# Altium PCB M3 M4 LQFP144_1.PcbDoc
Units mil, origin at the board's own origin, x right, y up, seen from the top; angles counter-clockwise.
Board outline 2214.4 x 3310.03 mil, 2 copper layers (Top Layer, Bottom Layer); 5 components, 0 nets, 132 pads, 0 vias.
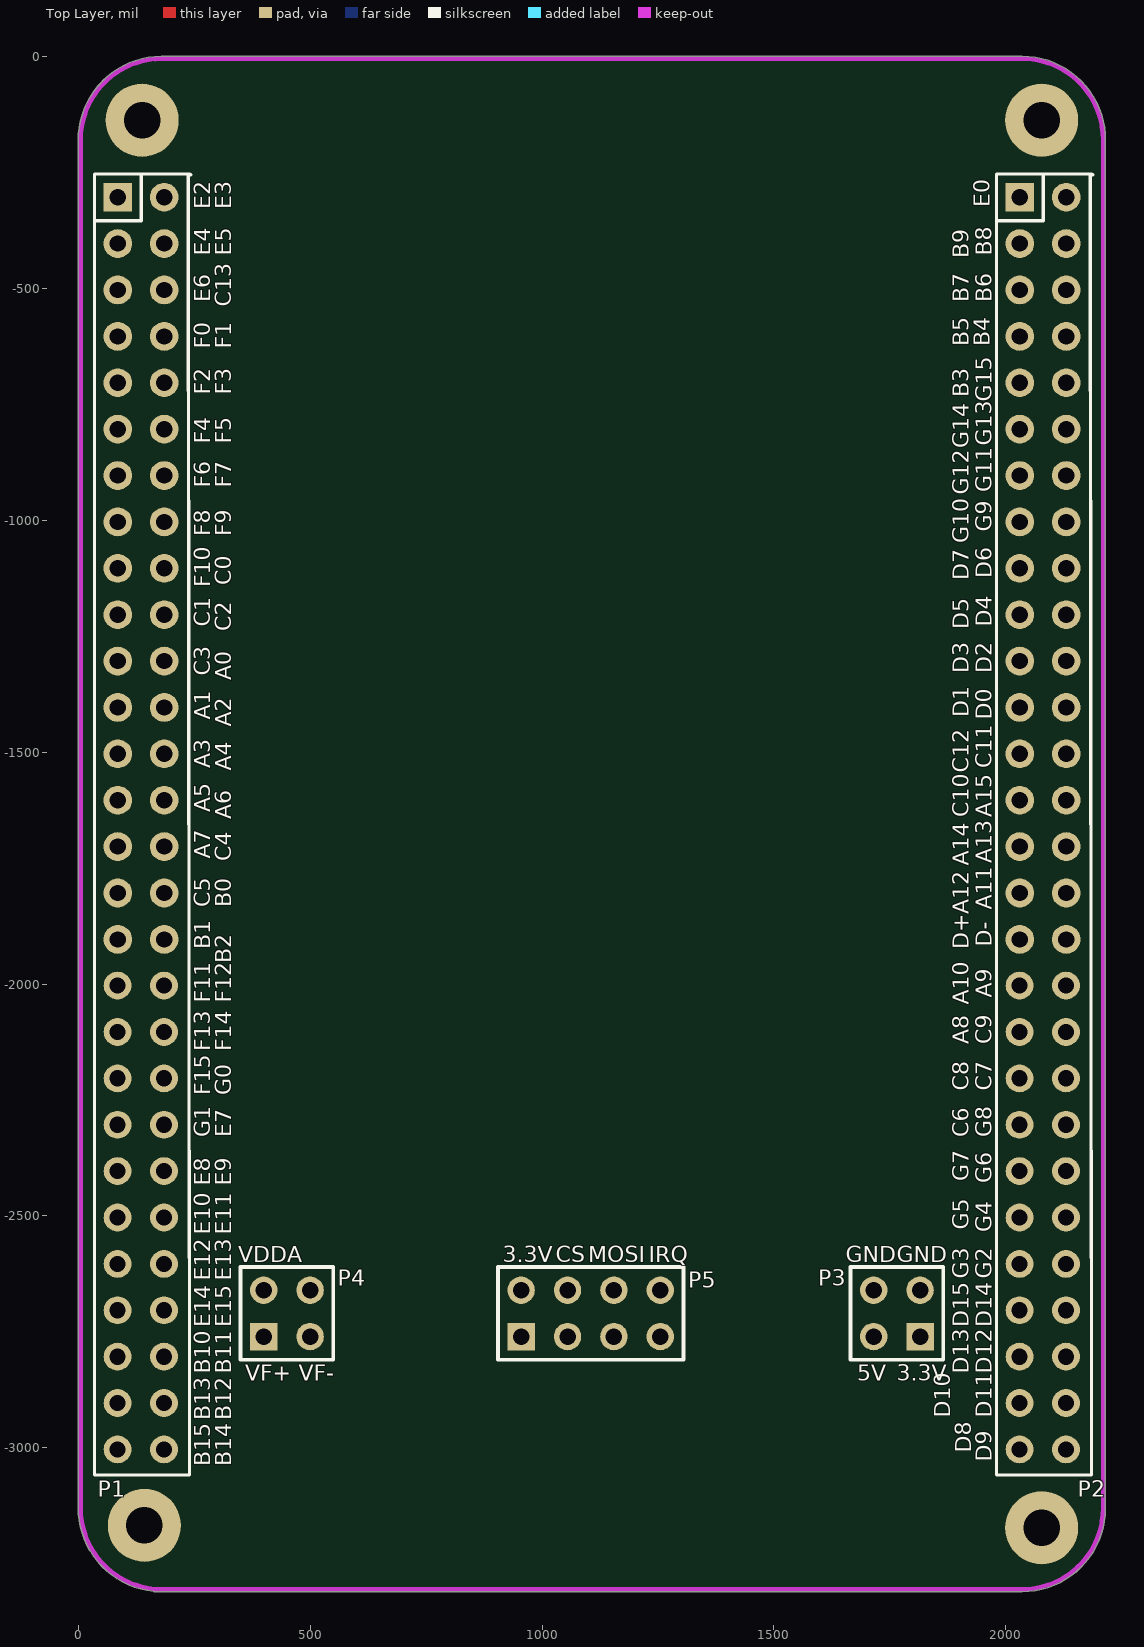
[diagram p0: Top Layer view]
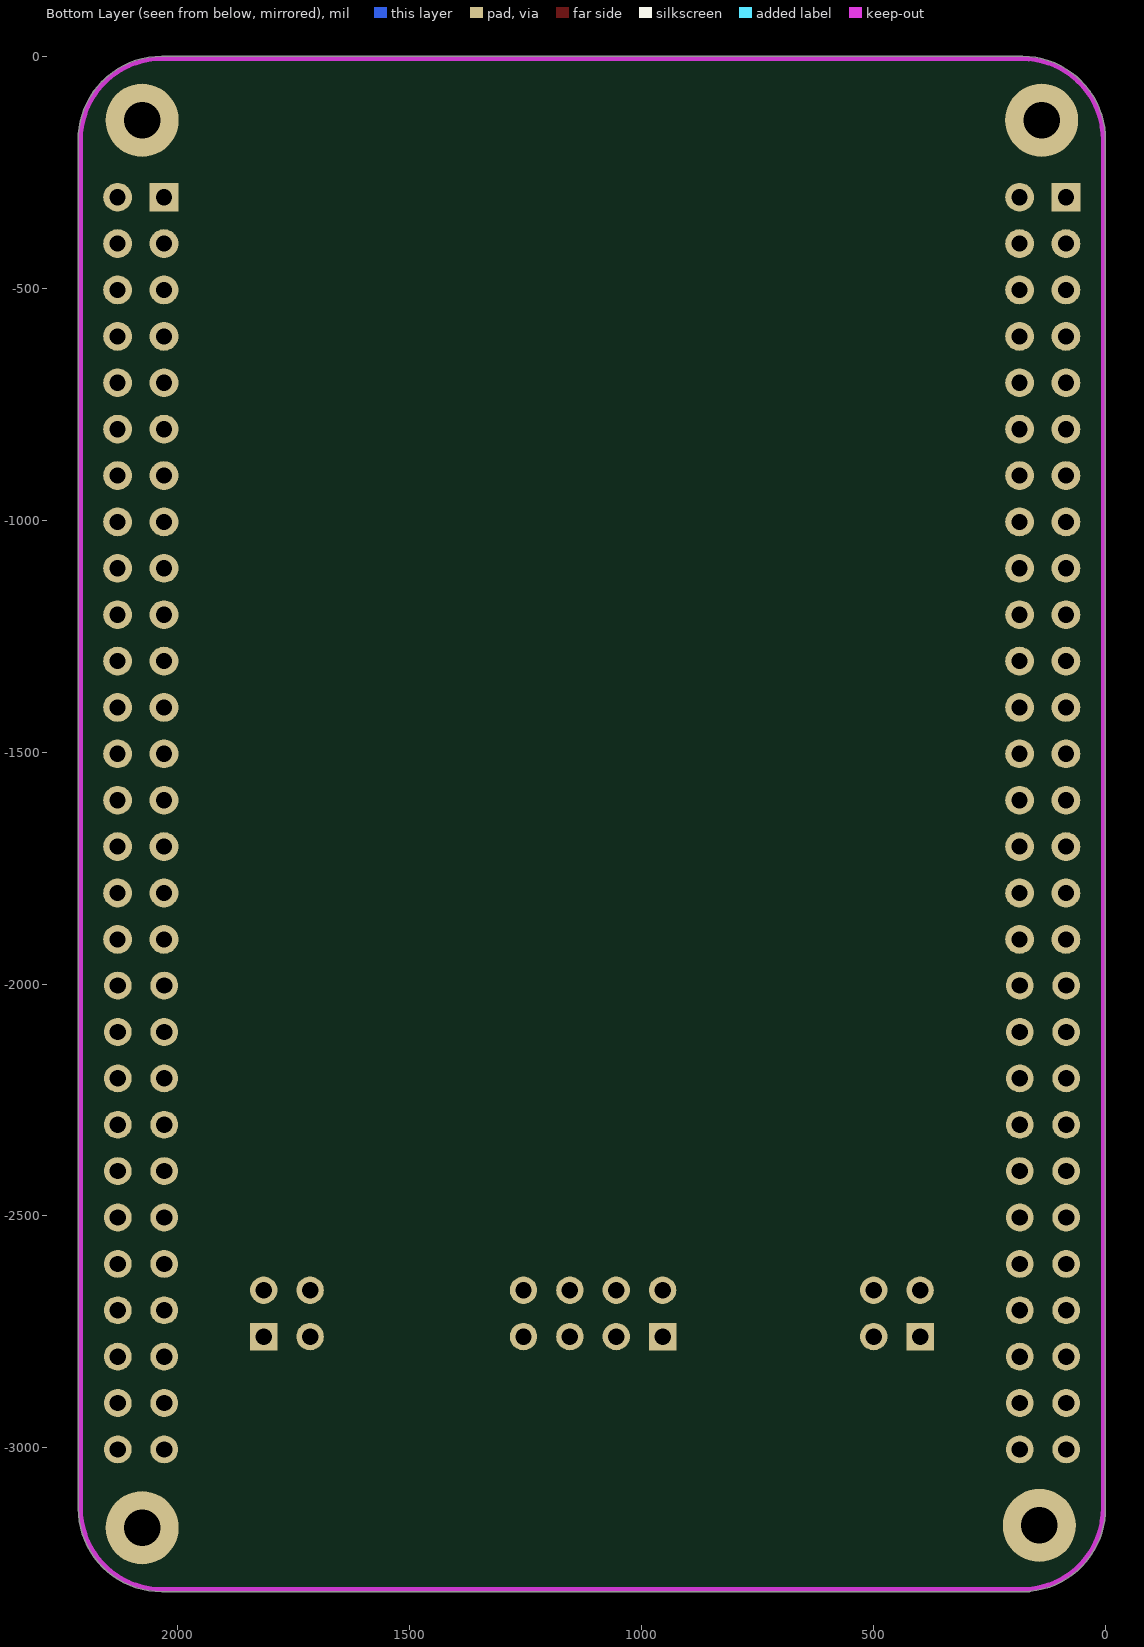
[diagram p1: Bottom Layer view, seen from below]

## Layer stack, top to bottom
Top Layer: signal copper 1.4
Dielectric: dielectric 12.6, FR-4, Dk 4.8
Bottom Layer: signal copper 1.4

## Board outline
0.69,-3141.94 ccw(c180.24,-3130.07) 162.11,-3309.1 ccw(c165,-3305) 165,-3310.02 2034.68,-3310.02 ccw(c2034.68,-3305) 2034.7,-3310.02 ccw(c2034.76,-3130.07) 2214.7,-3130.07 2214.7,-170 ccw(c2209.68,-170) 2214.31,-168.06 ccw(c2034.76,-179.93) 2034.76,0.01 180,0.01 ccw(c180,-5) 179.14,-0.06 ccw(c180.24,-180) 0.7,-168.04 ccw(c5.32,-170) 0.3,-170 0.3,-3140 ccw(c5.32,-3140)

## Design rules (kind name [scope] priority, off if disabled: settings)
Clearance [All] p1: gap=8
PolygonConnect [All] p1: connectstyle=Direct reliefconductorwidth=10 reliefentries=4 polygonreliefangle="90 Angle"
RoutingVias [All] p1: holewidth=28 width=50 viastyle="Through Hole" minholewidth=15 minwidth=15 maxholewidth=28 maxwidth=50
SolderMaskExpansion [All] p1: expansion=4
TestPointUsage [All] p1: valid=0 allowmultiple=FALSE
Testpoint [All] p1: side=15 testpointundercomponent=TRUE minsize=40 maxsize=100 preferedsize=60 minholesize=0 maxholesize=40 preferedholesize=32 testpointgrid=1 style=1023 order=0-112345678
Width [All] p1: maxlimit=70 minlimit=8 preferedwidth=10
19 further rules are at their usual default settings.

## Components (designator, comment, footprint, x,y, rotation, side; value= is the part's Value field where it differs from the comment)
P1 "HEAD2*27" HEAD2*27 135.24,-1653.54 r270 top
P2 "HEAD2*27" HEAD2*27 2079.76,-1653.54 r270 top
P3 "VREF" HDR2X2 1815,-2760 r90 top
P4 "VREF" HDR2X2 400,-2760 r0 top
P5 "NRF2401" HDR2X4 955,-2760 r0 top

## Footprints (in the part's own frame and the unit in brackets; to place one, negate y for a bottom-side part, rotate by r counter-clockwise, add the part's x,y. Pads: shape width x height; smd on the part's side, far side on the other; paste and mask are expansions set on the pad)
HDR2X2 [mm]
  rect 1.5x1.5 hole 0.9: 1(0,0)
  round 1.5 hole 0.9: 2(0,2.54) 3(2.54,0) 4(2.54,2.54)
  silkscreen extent -1.27,-1.27 3.81,3.81
HDR2X4 [mm] "Connector; Header; 4x2 Position"
  rect 1.5x1.5 hole 0.9: 1(0,0)
  round 1.5 hole 0.9: 2(0,2.54) 3(2.54,0) 4(2.54,2.54) 5(5.08,0) 6(5.08,2.54) 7(7.62,0) 8(7.62,2.54)
  silkscreen extent -1.27,-1.27 8.89,3.81
HEAD2*27 [mil]
  rect 62x62 hole 35: 1(-1349.79,-49.79)
  round 62 hole 35: 2(-1349.79,50.21) 3(-1249.79,-49.79) 4(-1249.79,50.21) 5(-1149.79,-49.79) 6(-1149.79,50.21) 7(-1049.79,-49.79) 8(-1049.79,50.21) 9(-949.79,-49.79) 10(-949.79,50.21) 11(-849.79,-49.79) 12(-849.79,50.21) 13(-749.79,-49.79) 14(-749.79,50.21) 15(-649.79,-49.79) 16(-649.79,50.21) 17(-549.79,-49.79) 18(-549.79,50.21) 19(-449.79,-49.79) 20(-449.79,50.21) 21(-349.79,-49.79) 22(-349.79,50.21) 23(-249.79,-49.79) 24(-249.79,50.21) 25(-149.79,-49.79) 26(-149.79,50.21) 27(-49.79,-49.79) 28(-49.79,50.21) 29(50.21,-49.79) 30(50.21,50.21) 31(150.21,-49.79) 32(150.21,50.21) 33(250.21,-49.79) 34(250.21,50.21)
  round 60 hole 35: 35(349.79,-50.21) 36(349.79,49.79) 37(449.79,-50.21) 38(449.79,49.79) 39(549.79,-50.21) 40(549.79,49.79) 41(649.79,-50.21) 42(649.79,49.79) 43(749.79,-50.21) 44(749.79,49.79) 45(849.79,-50.21) 46(849.79,49.79) 47(949.79,-50.21) 48(949.79,49.79) 49(1049.79,-50.21) 50(1049.79,49.79) 51(1149.79,-50.21) 52(1149.79,49.79) 53(1249.79,-50.21) 54(1249.79,49.79) 55(1349.79,-50.21) 56(1349.79,49.79)
  silkscreen extent -1400,-100 1405,107

## Part data
P3 P4: library part "Header 2X2", "Header, 2-Pin, Dual row"
P5: library part "Header 4X2", "Header, 4-Pin, Dual row"

## Free pads (board coordinates)
  round 157.48 hole 78.74: 0(137.8,-137.8) 0(142.8,-3167.2) 0(2077.2,-3172.2) 0(2077.2,-137.8)

## Nets (pads, with @x,y where several pads share a name; then routed paths per layer and width w, separated by ;. In a path a pad name is that pad's centre, name@x,y a point inside that pad or via, vN(x,y) a via of type N, cw(c..) or ccw(c..) an arc to the next point about the centre after c; other vN are vias at no path point)
pads on no net: P1.1 P1.2 P1.3 P1.4 P1.5 P1.6 P1.7 P1.8 P1.9 P1.10 P1.11 P1.12 P1.13 P1.14 P1.15 P1.16 P1.17 P1.18 P1.19 P1.20 P1.21 P1.22 P1.23 P1.24 P1.25 P1.26 P1.27 P1.28 P1.29 P1.30 P1.31 P1.32 P1.33 P1.34 P1.35 P1.36 P1.37 P1.38 P1.39 P1.40 P1.41 P1.42 P1.43 P1.44 P1.45 P1.46 P1.47 P1.48 P1.49 P1.50 P1.51 P1.52 P1.53 P1.54 P1.55 P1.56 P2.1 P2.2 P2.3 P2.4 P2.5 P2.6 P2.7 P2.8 P2.9 P2.10 P2.11 P2.12 P2.13 P2.14 P2.15 P2.16 P2.17 P2.18 P2.19 P2.20 P2.21 P2.22 P2.23 P2.24 P2.25 P2.26 P2.27 P2.28 P2.29 P2.30 P2.31 P2.32 P2.33 P2.34 P2.35 P2.36 P2.37 P2.38 P2.39 P2.40 P2.41 P2.42 P2.43 P2.44 P2.45 P2.46 P2.47 P2.48 P2.49 P2.50 P2.51 P2.52 P2.53 P2.54 P2.55 P2.56 P3.1 P3.2 P3.3 P3.4 P4.1 P4.2 P4.3 P4.4 P5.1 P5.2 P5.3 P5.4 P5.5 P5.6 P5.7 P5.8

## Keep-outs
Keep-Out Layer:
  lines w10: 5.32,-3140 5.32,-170 ; 5.32,-3130 ccw(c180.24,-3130.07) 180.24,-3305 ; 5.32,-180 cw(c180.24,-180) 180.31,-5.07 ; 165,-3305 2034.68,-3305 ccw(c2034.76,-3130.07) 2209.69,-3130.07 2209.68,-170 ; 180,-5 2034.76,-5 cw(c2034.76,-179.93) 2209.68,-180

## Silkscreen, mask and mechanical layers (free items; w line width, h text height)
Top Overlay:
  text "E0" at 1965,-325 h35 r90
  text "E2" at 285,-330 h35 r90
  text "E3" at 330,-330 h35 r90
  text "E4" at 285,-430 h35 r90
  text "E5" at 330,-430 h35 r90
  text "B8" at 1970,-430 h35 r90
  text "B9" at 1920,-435 h35 r90
  text "E6" at 285,-530 h35 r90
  text "B7" at 1920,-530 h35 r90
  text "B6" at 1970,-530 h35 r90
  text "C13" at 330,-540 h35 r90
  text "B5" at 1920,-625 h35 r90
  text "B4" at 1965,-625 h35 r90
  text "F0" at 285,-630 h35 r90
  text "F1" at 330,-630 h35 r90
  text "F2" at 285,-730 h35 r90
  text "F3" at 330,-730 h35 r90
  text "B3" at 1920,-735 h35 r90
  text "G15" at 1970,-745 h35 r90
  text "F4" at 285,-835 h35 r90
  text "F5" at 330,-835 h35 r90
  text "G13" at 1970,-840 h35 r90
  text "G14" at 1920,-845 h35 r90
  text "F6" at 285,-930 h35 r90
  text "F7" at 330,-930 h35 r90
  text "G11" at 1970,-940 h35 r90
  text "G12" at 1920,-945 h35 r90
  text "G9" at 1970,-1025 h35 r90
  text "F8" at 285,-1035 h35 r90
  text "F9" at 330,-1035 h35 r90
  text "G10" at 1920,-1050 h35 r90
  text "D6" at 1970,-1125 h35 r90
  text "D7" at 1920,-1130 h35 r90
  text "C0" at 330,-1140 h35 r90
  text "F10" at 285,-1145 h35 r90
  text "C1" at 285,-1230 h35 r90
  text "D4" at 1970,-1230 h35 r90
  text "D5" at 1920,-1235 h35 r90
  text "C2" at 330,-1240 h35 r90
  text "D3" at 1920,-1330 h35 r90
  text "D2" at 1970,-1330 h35 r90
  text "C3" at 285,-1335 h35 r90
  text "A0" at 330,-1345 h35 r90
  text "D1" at 1920,-1425 h35 r90
  text "A1" at 285,-1430 h35 r90
  text "D0" at 1970,-1430 h35 r90
  text "A2" at 330,-1445 h35 r90
  text "A3" at 285,-1535 h35 r90
  text "C11" at 1970,-1535 h35 r90
  text "A4" at 330,-1540 h35 r90
  text "C12" at 1920,-1545 h35 r90
  text "A5" at 285,-1630 h35 r90
  text "C10" at 1920,-1640 h35 r90
  text "A15" at 1970,-1640 h35 r90
  text "A6" at 330,-1645 h35 r90
  text "A7" at 285,-1730 h35 r90
  text "C4" at 330,-1735 h35 r90
  text "A13" at 1970,-1740 h35 r90
  text "A14" at 1920,-1745 h35 r90
  text "C5" at 285,-1835 h35 r90
  text "B0" at 330,-1835 h35 r90
  text "A11" at 1970,-1840 h35 r90
  text "A12" at 1920,-1850 h35 r90
  text "D-" at 1970,-1920 h35 r90
  text "B1" at 285,-1925 h35 r90
  text "D+" at 1920,-1925 h35 r90
  text "B2" at 330,-1955 h35 r90
  text "A9" at 1970,-2030 h35 r90
  text "F11" at 285,-2040 h35 r90
  text "F12" at 330,-2040 h35 r90
  text "A10" at 1920,-2045 h35 r90
  text "A8" at 1920,-2130 h35 r90
  text "C9" at 1970,-2130 h35 r90
  text "F13" at 285,-2145 h35 r90
  text "F14" at 330,-2145 h35 r90
  text "C8" at 1920,-2230 h35 r90
  text "C7" at 1970,-2230 h35 r90
  text "F15" at 285,-2240 h35 r90
  text "G0" at 330,-2240 h35 r90
  text "G1" at 285,-2330 h35 r90
  text "E7" at 330,-2330 h35 r90
  text "C6" at 1920,-2330 h35 r90
  text "G8" at 1970,-2330 h35 r90
  text "G7" at 1920,-2425 h35 r90
  text "G6" at 1970,-2430 h35 r90
  text "E8" at 285,-2435 h35 r90
  text "E9" at 330,-2435 h35 r90
  text "G5" at 1920,-2530 h35 r90
  text "G4" at 1970,-2535 h35 r90
  text "E10" at 285,-2540 h35 r90
  text "E11" at 330,-2540 h35 r90
  text "VDDA" at 345,-2600 h35
  text "3.3V" at 915,-2600 h35
  text "CS" at 1030,-2600 h35
  text "MOSI" at 1100,-2600 h35
  text "IRQ" at 1230,-2600 h35
  text "GND" at 1655,-2600 h35
  text "GND" at 1765,-2600 h35
  text "G3" at 1920,-2635 h35 r90
  text "G2" at 1970,-2635 h35 r90
  text "E12" at 285,-2640 h35 r90
  text "E13" at 330,-2640 h35 r90
  text "E14" at 285,-2740 h35 r90
  text "E15" at 330,-2740 h35 r90
  text "D15" at 1920,-2740 h35 r90
  text "D14" at 1970,-2740 h35 r90
  text "B10" at 285,-2840 h35 r90
  text "B11" at 330,-2840 h35 r90
  text "D13" at 1920,-2840 h35 r90
  text "D12" at 1970,-2840 h35 r90
  text "VF+" at 360,-2855 h35
  text "VF-" at 475,-2855 h35
  text "5V" at 1680,-2855 h35
  text "3.3V" at 1765,-2855 h35
  text "D10" at 1880,-2935 h35 r90
  text "D11" at 1970,-2935 h35 r90
  text "B13" at 285,-2940 h35 r90
  text "B12" at 330,-2940 h35 r90
  text "D8" at 1925,-3010 h35 r90
  text "D9" at 1970,-3030 h35 r90
  text "B15" at 285,-3040 h35 r90
  text "B14" at 330,-3040 h35 r90